# Altium PCB pcb.PcbDoc
Units mil, origin at the board's own origin, x right, y up, seen from the top; angles counter-clockwise.
Board outline 3859 x 2592 mil, 2 copper layers (Top Layer, Bottom Layer); 73 components, 56 nets, 373 pads, 1 vias.
Unrouted connection lines stored in the file: 224.
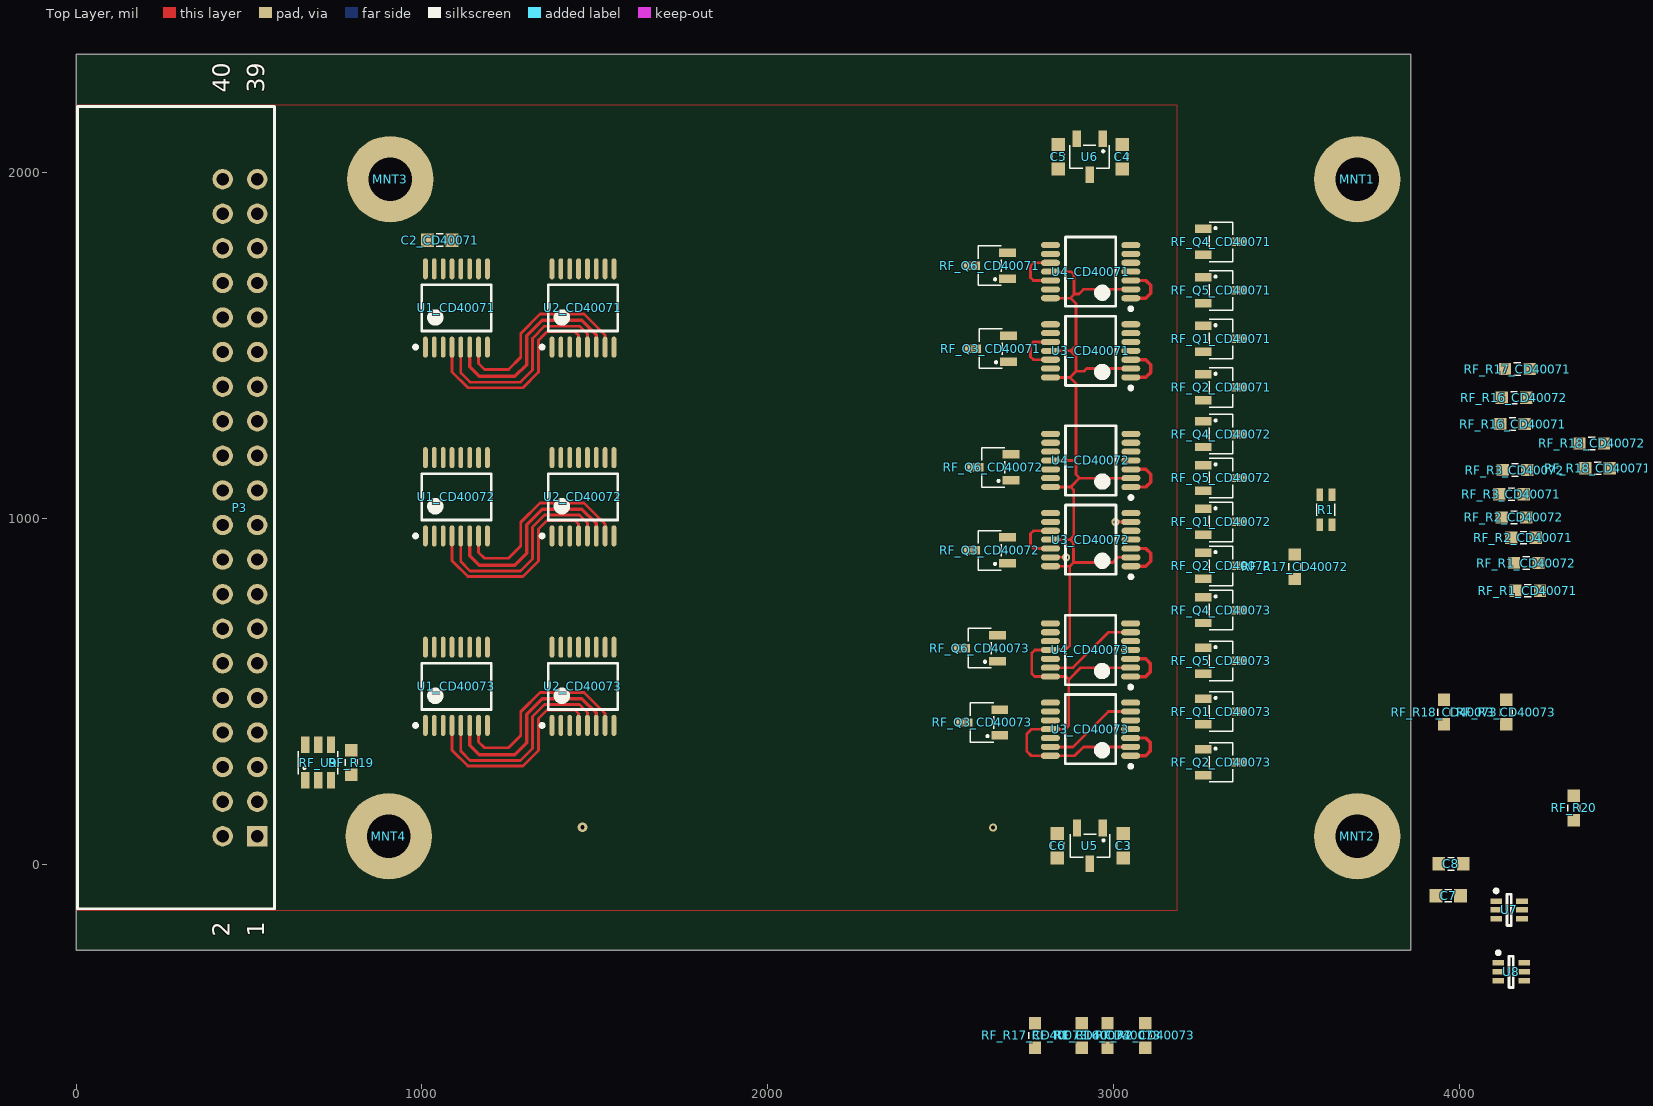
[diagram p0: Top Layer view]
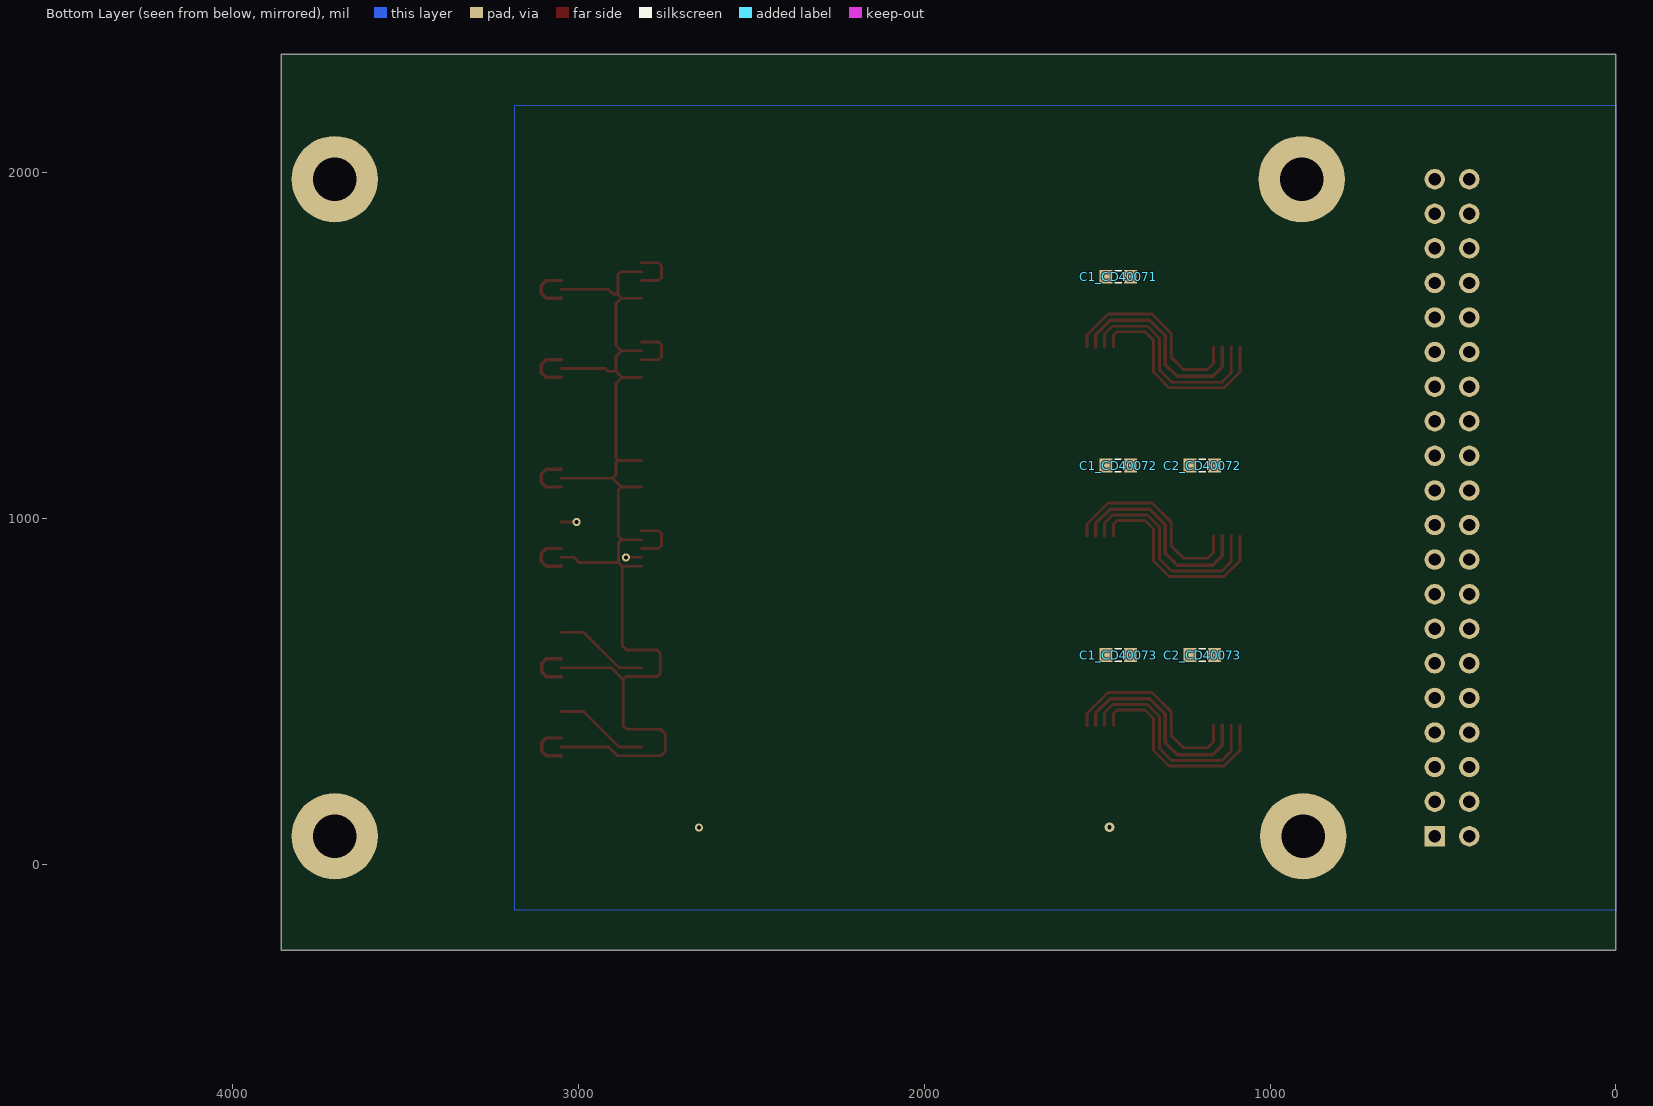
[diagram p1: Bottom Layer view, seen from below]

## Layer stack, top to bottom
Top Solder: solder mask 0.4, Solder Resist, Dk 3.5
Top Layer: signal copper 1.4
Dielectric 1: dielectric 12.6, FR-4, Dk 4.8
Bottom Layer: signal copper 1.4
Bottom Solder: solder mask 0.4, Solder Resist, Dk 3.5

## Board outline
0,-249 3859,-249 3859,2343 0,2343

## Design rules (kind name [scope] priority, off if disabled: settings)
Clearance Clearance_Polygon [InPolygon] p1: gap=12 ignorepadtopadclearanceinfootprint=FALSE except(0: Arc-Hole Track-Hole SMDPad-Hole THPad-Hole Via-Hole Fill-Hole Poly-Hole Region-Hole Text-Hole)
Clearance [All] p2: gap=6 ignorepadtopadclearanceinfootprint=TRUE
PolygonConnect PolygonConnect_Vias [IsVia] p1: connectstyle=Direct reliefconductorwidth=10 reliefentries=4 polygonreliefangle="90 Angle" airgapwidth=10
PolygonConnect [All] p2: connectstyle=Relief reliefconductorwidth=10 reliefentries=4 polygonreliefangle="90 Angle" airgapwidth=10
RoomDefinition CD40073 [InComponentClass('CD40073')] p1: confinementstyle=ConfineIn formatcopy=TRUE lockcomponents=FALSE outline 650,243.97 2640.76,243.97 2640.76,789.97 650,789.97
RoomDefinition CD40072 [InComponentClass('CD40072')] p2: confinementstyle=ConfineIn formatcopy=TRUE lockcomponents=FALSE outline 645,789.97 2640.76,789.97 2640.76,1335.97 645,1335.97
RoomDefinition CD40071 [InComponentClass('CD40071')] p3: confinementstyle=ConfineIn formatcopy=TRUE lockcomponents=FALSE outline 650,1335.97 2640.44,1335.97 2640.44,1881.97 650,1881.97
RoutingVias [All] p1: holewidth=11.81 width=23.81 viastyle="Through Hole" minholewidth=11.81 minwidth=23.81 maxholewidth=248.03 maxwidth=300.03
ShortCircuit ShortCircuit_general [All] p1: allowed=FALSE
SolderMaskExpansion [All] p1: expansion=4
Width [All] p1: maxlimit=100 minlimit=6 preferedwidth=8
29 further rules are at their usual default settings.

## Classes and differential pairs
channel class CD4007_with_mux: CD40071 CD40072 CD40073
component class top: C3 C4 C5 C6 C7 C8 MNT1 MNT2 MNT3 MNT4 P3 R1 RF_R19 RF_R20 RF_U9 U5 U6 U7 U8
component class CD40073: C1_CD40073 C2_CD40073 RF_Q1_CD40073 RF_Q2_CD40073 RF_Q3_CD40073 RF_Q4_CD40073 RF_Q5_CD40073 RF_Q6_CD40073 RF_R1_CD40073 RF_R2_CD40073 RF_R3_CD40073 RF_R16_CD40073 RF_R17_CD40073 RF_R18_CD40073 U1_CD40073 U2_CD40073 U3_CD40073 U4_CD40073
component class CD40072: C1_CD40072 C2_CD40072 RF_Q1_CD40072 RF_Q2_CD40072 RF_Q3_CD40072 RF_Q4_CD40072 RF_Q5_CD40072 RF_Q6_CD40072 RF_R1_CD40072 RF_R2_CD40072 RF_R3_CD40072 RF_R16_CD40072 RF_R17_CD40072 RF_R18_CD40072 U1_CD40072 U2_CD40072 U3_CD40072 U4_CD40072
component class CD40071: C1_CD40071 C2_CD40071 RF_Q1_CD40071 RF_Q2_CD40071 RF_Q3_CD40071 RF_Q4_CD40071 RF_Q5_CD40071 RF_Q6_CD40071 RF_R1_CD40071 RF_R2_CD40071 RF_R3_CD40071 RF_R16_CD40071 RF_R17_CD40071 RF_R18_CD40071 U1_CD40071 U2_CD40071 U3_CD40071 U4_CD40071

## Components (designator, comment, footprint, x,y, rotation, side; value= is the part's Value field where it differs from the comment)
C1_CD40071 "100n/50V" SMD_Capacitor_0603 1439.44,1698.97 r180 bottom (schematic designator C1)
C1_CD40072 "100n/50V" SMD_Capacitor_0603 1439.76,1152.97 r180 bottom (schematic designator C1)
C1_CD40073 "100n/50V" SMD_Capacitor_0603 1439,604.97 r180 bottom (schematic designator C1)
C2_CD40071 "100n/50V" SMD_Capacitor_0603 1052,1805 r180 top (schematic designator C2)
C2_CD40072 "100n/50V" SMD_Capacitor_0603 1196.76,1152.97 r180 bottom (schematic designator C2)
C2_CD40073 "100n/50V" SMD_Capacitor_0603 1196,604.97 r180 bottom (schematic designator C2)
C3 "100n/50V" SMD_Capacitor_0603 3028,53.41 r270 top
C4 "100n/50V" SMD_Capacitor_0603 3025,2045.97 r270 top
C5 "100n/50V" SMD_Capacitor_0603 2840,2045.97 r270 top
C6 "100n/50V" SMD_Capacitor_0603 2838,53.41 r270 top
C7 "100n/50V" SMD_Capacitor_0603 3968,-91.03 r0 top
C8 "100n/50V" SMD_Capacitor_0603 3976,1 r0 top
MNT1 "Mounting Hole" PC-104_PcbMntHole_M3 3705,1981 r180 top
MNT2 "Mounting Hole" PC-104_PcbMntHole_M3 3705,81 r0 top
MNT3 "Mounting Hole" PC-104_PcbMntHole_M3 909,1981 r0 top
MNT4 "Mounting Hole" PC-104_PcbMntHole_M3 904,81 r0 top
P3 "IDC-40-RadFET" IDC-40-Male-Socket-Angle 524,81 r90 top
R1 "PT1000" SMD_Resistor-shunt_0805 3614,1025 r90 top
RF_Q1_CD40071 "MMBFJ270" SOT23-3 3311,1519.33 r0 top (schematic designator RF_Q1)
RF_Q1_CD40072 "MMBFJ270" SOT23-3 3311,990 r0 top (schematic designator RF_Q1)
RF_Q1_CD40073 "MMBFJ270" SOT23-3 3311,441.67 r0 top (schematic designator RF_Q1)
RF_Q2_CD40071 "MMBFJ270" SOT23-3 3311,1379 r0 top (schematic designator RF_Q2)
RF_Q2_CD40072 "MMBFJ270" SOT23-3 3311,863 r0 top (schematic designator RF_Q2)
RF_Q2_CD40073 "MMBFJ270" SOT23-3 3311,295 r0 top (schematic designator RF_Q2)
RF_Q3_CD40071 "MMBFJ270" SOT23-3 2645,1491 r180 top (schematic designator RF_Q3)
RF_Q3_CD40072 "MMBFJ270" SOT23-3 2642,908 r180 top (schematic designator RF_Q3)
RF_Q3_CD40073 "MMBFJ270" SOT23-3 2620,410 r180 top (schematic designator RF_Q3)
RF_Q4_CD40071 "MMBFJ270" SOT23-3 3311,1800 r0 top (schematic designator RF_Q4)
RF_Q4_CD40072 "MMBFJ270" SOT23-3 3311,1244 r0 top (schematic designator RF_Q4)
RF_Q4_CD40073 "MMBFJ270" SOT23-3 3311,735 r0 top (schematic designator RF_Q4)
RF_Q5_CD40071 "MMBFJ270" SOT23-3 3311,1659.67 r0 top (schematic designator RF_Q5)
RF_Q5_CD40072 "MMBFJ270" SOT23-3 3311,1117 r0 top (schematic designator RF_Q5)
RF_Q5_CD40073 "MMBFJ270" SOT23-3 3311,588.33 r0 top (schematic designator RF_Q5)
RF_Q6_CD40071 "MMBFJ270" SOT23-3 2642,1731 r180 top (schematic designator RF_Q6)
RF_Q6_CD40072 "MMBFJ270" SOT23-3 2652,1148 r180 top (schematic designator RF_Q6)
RF_Q6_CD40073 "MMBFJ270" SOT23-3 2613,625 r180 top (schematic designator RF_Q6)
RF_R1_CD40071 "100k" SMD_Resistor_0603 4198,791 r0 top (schematic designator RF_R1)
RF_R1_CD40072 "100k" SMD_Resistor_0603 4193.43,871 r0 top (schematic designator RF_R1)
RF_R1_CD40073 "100k" SMD_Resistor_0603 2908,-495.03 r90 top (schematic designator RF_R1)
RF_R2_CD40071 "100k" SMD_Resistor_0603 4185.57,944 r0 top (schematic designator RF_R2)
RF_R2_CD40072 "100k" SMD_Resistor_0603 4158,1003 r0 top (schematic designator RF_R2)
RF_R2_CD40073 "100k" SMD_Resistor_0603 3092,-495.03 r90 top (schematic designator RF_R2)
RF_R3_CD40071 "100k" SMD_Resistor_0603 4151,1070 r0 top (schematic designator RF_R3)
RF_R3_CD40072 "100k" SMD_Resistor_0603 4161,1140 r0 top (schematic designator RF_R3)
RF_R3_CD40073 "100k" SMD_Resistor_0603 4136,439.97 r90 top (schematic designator RF_R3)
RF_R16_CD40071 "100k" SMD_Resistor_0603 4154,1273 r0 top (schematic designator RF_R16)
RF_R16_CD40072 "100k" SMD_Resistor_0603 4158,1349 r0 top (schematic designator RF_R16)
RF_R16_CD40073 "100k" SMD_Resistor_0603 2983,-495.03 r90 top (schematic designator RF_R16)
RF_R17_CD40071 "100k" SMD_Resistor_0603 4168,1432 r0 top (schematic designator RF_R17)
RF_R17_CD40072 "100k" SMD_Resistor_0603 3524,860 r90 top (schematic designator RF_R17)
RF_R17_CD40073 "100k" SMD_Resistor_0603 2773,-495.03 r90 top (schematic designator RF_R17)
RF_R18_CD40071 "100k" SMD_Resistor_0603 4400,1145 r0 top (schematic designator RF_R18)
RF_R18_CD40072 "100k" SMD_Resistor_0603 4383,1217 r0 top (schematic designator RF_R18)
RF_R18_CD40073 "100k" SMD_Resistor_0603 3956,439.97 r90 top (schematic designator RF_R18)
RF_R19 "75k" SMD_Resistor_0603 796,294 r90 top
RF_R20 "100k" SMD_Resistor_0603 4331,162.97 r90 top
RF_U9 "TPS2551DBVx" SOT23-6 700,294 r90 top
U1_CD40071 "ADG708BRU" ADI-RU-16_N 1100,1608.65 r90 top (schematic designator U1)
U1_CD40072 "ADG708BRU" ADI-RU-16_N 1100,1062.65 r90 top (schematic designator U1)
U1_CD40073 "ADG708BRU" ADI-RU-16_N 1100,514.65 r90 top (schematic designator U1)
U2_CD40071 "ADG708BRU" ADI-RU-16_N 1466,1608.65 r90 top (schematic designator U2)
U2_CD40072 "ADG708BRU" ADI-RU-16_N 1466,1062.65 r90 top (schematic designator U2)
U2_CD40073 "ADG708BRU" ADI-RU-16_N 1466,514.65 r90 top (schematic designator U2)
U3_CD40071 "CD4007" TSSOP14 2934,1484.65 r180 top (schematic designator U3)
U3_CD40072 "CD4007" TSSOP14 2934.32,938.65 r180 top (schematic designator U3)
U3_CD40073 "CD4007" TSSOP14 2933.56,390.65 r180 top (schematic designator U3)
U4_CD40071 "CD4007" TSSOP14 2934,1713.65 r180 top (schematic designator U4)
U4_CD40072 "CD4007" TSSOP14 2934.32,1167.65 r180 top (schematic designator U4)
U4_CD40073 "CD4007" TSSOP14 2933.56,619.65 r180 top (schematic designator U4)
U5 "LM60" SOT23-3 2932,53.41 r270 top
U6 "LM60" SOT23-3 2931,2045.97 r270 top
U7 "ADG849YKSZ" SC70-LT6_N 4144,-132.03 r0 top
U8 "ADG849YKSZ" SC70-LT6_N 4150,-311 r0 top

## Footprints (in the part's own frame and the unit in brackets; to place one, negate y for a bottom-side part, rotate by r counter-clockwise, add the part's x,y. Pads: shape width x height; smd on the part's side, far side on the other; paste and mask are expansions set on the pad)
ADI-RU-16_N [mm] "SOP, 16-Leads, Body 5x4.4mm, Pitch 0.65mm, IPC Medium Density"
  oval 1.55x0.35 smd: 1(-2.875,2.275) 2(-2.875,1.625) 3(-2.875,0.975) 4(-2.875,0.325) 5(-2.875,-0.325) 6(-2.875,-0.975) 7(-2.875,-1.625) 8(-2.875,-2.275) 9(2.875,-2.275) 10(2.875,-1.625) 11(2.875,-0.975) 12(2.875,-0.325) 13(2.875,0.325) 14(2.875,0.975) 15(2.875,1.625) 16(2.875,2.275)
  silkscreen extent -3,-2.55 1.7,3.12, body extent -2.25,-2.55 2.25,2.55, height 1.2
IDC-40-Male-Socket-Angle [mm] "Connector; IDC 40, Male Socket Angle"
  rect 1.5x1.5 hole 0.9: 1(0,0)
  round 1.5 hole 0.9: 2(0,2.54) 3(2.54,0) 4(2.54,2.54) 5(5.08,0) 6(5.08,2.54) 7(7.62,0) 8(7.62,2.54) 9(10.16,0) 10(10.16,2.54) 11(12.7,0) 12(12.7,2.54) 13(15.24,0) 14(15.24,2.54) 15(17.78,0) 16(17.78,2.54) 17(20.32,0) 18(20.32,2.54) 19(22.86,0) 20(22.86,2.54) 21(25.4,0) 22(25.4,2.54) 23(27.94,0) 24(27.94,2.54) 25(30.48,0) 26(30.48,2.54) 27(33.02,0) 28(33.02,2.54) 29(35.56,0) 30(35.56,2.54) 31(38.1,0) 32(38.1,2.54) 33(40.64,0) 34(40.64,2.54) 35(43.18,0) 36(43.18,2.54) 37(45.72,0) 38(45.72,2.54) 39(48.26,0) 40(48.26,2.54)
  silkscreen extent -5.33,-1.27 53.59,13.21, body extent -5.39,-0.25 53.65,13.31, height 9.08
PC-104_PcbMntHole_M3 [mm] "PCB Mounting Hole for PC-104 standard. Based on Pumpkin's Kit."
  round 6.35 hole 3.2: 1(0,0)
SC70-LT6_N [mm] "SOT353, 6-Leads, Body 2x1.3mm, Pitch 0.65mm, Lead Span 2.1mm, IPC Medium Density"
  rect 0.85x0.4 smd: 1(-0.95,0.65) 2(-0.95,0) 3(-0.95,-0.65) 4(0.95,-0.65) 5(0.95,0) 6(0.95,0.65)
  silkscreen extent -1.07,-1.15 0.15,1.52, body extent -1.05,-1 1.05,1, height 0.93
SMD_Capacitor_0603 [mm] "SMD Capacitor, Inch 0603, Metric 1608."
  rect 0.95x1 smd: 1(-0.9,0) 2(0.9,0)
  silkscreen extent -0.25,-0.45 0.25,0.45, body extent -0.8,-0.4 0.8,0.4, height 0.3
SMD_Resistor-shunt_0805 [mm] "SMD Shunt Resistor, Inch 0805, Metric 2012."
  rect 0.9x0.5 smd: 1(-1.1,0.45) 2(-1.1,-0.45) 3(1.1,-0.45) 4(1.1,0.45)
  silkscreen extent -0.45,-0.65 0.45,0.65, body extent -1,-0.62 1,0.63, height 0.5
SMD_Resistor_0603 [mm] "SMD Resistor, Inch 0603, Metric 1608."
  rect 0.9x0.9 smd: 1(-0.9,0) 2(0.9,0)
  silkscreen extent -0.25,-0.45 0.25,0.45, body extent -0.8,-0.45 0.8,0.45, height 0.5
SOT23-3 [mm] "JEDEC TO-236AB package."
  rect 1.22x0.62 smd: 1(-1.31,0.95) 2(-1.31,-0.95) 3(1.31,0)
  silkscreen extent -0.85,-1.45 0.85,1.45, body extent -1.4,-1.45 1.4,1.45, height 1.3
SOT23-6 [mm] "JEDEC MO-178AB package."
  rect 1.22x0.62 smd: 1(-1.31,0.95) 2(-1.31,0) 3(-1.31,-0.95) 4(1.31,-0.95) 5(1.31,0) 6(1.31,0.95)
  silkscreen extent -0.85,-1.45 0.85,1.45, body extent -1.4,-1.45 1.4,1.45, height 1.45
TSSOP14 [mm] "TSSOP, 14-Leads, Body 5.00x4.40mm, Pitch 0.65mm, IPC Medium Density"
  oval 1.4x0.45 smd: 1(-2.95,1.95) 2(-2.95,1.3) 3(-2.95,0.65) 4(-2.95,0) 5(-2.95,-0.65) 6(-2.95,-1.3) 7(-2.95,-1.95) 8(2.95,-1.95) 9(2.95,-1.3) 10(2.95,-0.65) 11(2.95,0) 12(2.95,0.65) 13(2.95,1.3) 14(2.95,1.95)
  silkscreen extent -3.08,-2.55 1.85,2.85, body extent -3.2,-2.55 3.2,2.55, height 1.2

## Part data
C1_CD40071 C1_CD40072 C1_CD40073 C2_CD40071 C2_CD40072 C2_CD40073 C3 C4 C5 C6 C7 C8: library part Cer_C0603T104K5RALTU, "Ceramic Cap Kemet COTS 100n/50V X7R 0603", Manufacturer=Kemet, ManufacturerPartNumber=C0603T104K5RALTU, Package=0603
MNT1 MNT2 MNT3 MNT4: library part MntHole, "PCB Mounting Hole"
R1: "Platinum Thin-Film Chip Sensor", Manufacturer="IST INNOVATIVE SENSOR TECHNOLOGY", ManufacturerPartNumber=P1K0.0805.2P.A, Package=0805_Shunt, Farnell=http://pl.farnell.com/ist-innovative-sensor-technology/p1k0-0805-2p-a/sensor-pt1000-smd0805-class-a/dp/1266951, Manufacturer's Datasheet=http://www.farnell.com/datasheets/57422.pdf, TCR=3850ppm/K
RF_Q1_CD40071 RF_Q1_CD40072 RF_Q1_CD40073 RF_Q2_CD40071 RF_Q2_CD40072 RF_Q2_CD40073 RF_Q3_CD40071 RF_Q3_CD40072 RF_Q3_CD40073 RF_Q4_CD40071 RF_Q4_CD40072 RF_Q4_CD40073 RF_Q5_CD40071 RF_Q5_CD40072 RF_Q5_CD40073 RF_Q6_CD40071 RF_Q6_CD40072 RF_Q6_CD40073: "JFET, P-Channel, 3-Pin SOT-23, Pb-Free, Tape and Reel", Manufacturer="On Semiconductor", ComponentLink1Description="Manufacturer URL", ComponentLink1URL=http://www.onsemi.com/, ComponentLink2Description=Datasheet, ComponentLink2URL=http://www.onsemi.com/pub_link/Collateral/MMBFJ177LT1-D.PDF, ComponentLink3Description="Package Specification", Mounting Technology="Surface Mount", PackageDescription="3-Pin Small Outline Transistor, Body 2.92 x 1.3 mm, Pitch 0.95 mm", PartNumber=MMBFJ270, RoHS=Pb-Free
RF_R1_CD40071 RF_R1_CD40072 RF_R1_CD40073 RF_R2_CD40071 RF_R2_CD40072 RF_R2_CD40073 RF_R3_CD40071 RF_R3_CD40072 RF_R3_CD40073 RF_R16_CD40071 RF_R16_CD40072 RF_R16_CD40073 RF_R17_CD40071 RF_R17_CD40072 RF_R17_CD40073 RF_R18_CD40071 RF_R18_CD40072 RF_R18_CD40073 RF_R19 RF_R20: library part Res, Package=0603
RF_U9: "Adjustable Current-Limited Power-Distribution Switch.", Manufacturer="Texas Instruments"
U1_CD40071 U1_CD40072 U1_CD40073 U2_CD40071 U2_CD40072 U2_CD40073: "1.8 to 5.5 V / +/-2.5 V, CMOS Low Voltage 3 Ohm, 8-Channel Multiplexer, -40 to 125 degC, 16-pin SOP (RU-16), Tube", Manufacturer="Analog Devices", Supplier Part Number 1=ADG708BRU-ND, Bandwidth (Hz)=55M, Code_JEDEC=MO-153AB, ComponentLink1Description="Manufacturer URL", ComponentLink1URL=http://www.analog.com/en/index.html, ComponentLink2Description=Datasheet, ComponentLink2URL=http://www.analog.com/static/imported-files/data_sheets/ADG708_709.pdf, ComponentLink3Description="Package Specification", ComponentLink3URL=http:/www.analog.com/static/imported-files/packages/36244347913743854010197452789RU16.pdf, DatasheetVersion="Rev. C", Max Analog Signal Range="Vss to Vdd", Mounting Technology="Surface Mount", PackageDescription="16-Pin Thin Shrink Small Outline Package, Body 5 x 4.4 mm, Pitch 0.65 mm", PackageReference=RU-16, PackageVersion=Nov-02, Packing=Tube, PartNumber=ADG708BRU, Ron (ohms)=3, Supplier 1=Digi-Key, Supplier 2=Mouser, Supplier Part Number 2=584-ADG708BRU, Supply V Guar Performance="Dual_(+/-2.5V), Single_(+3V), Single_(+5V)", t transition (s)=14n
U3_CD40071 U3_CD40072 U3_CD40073 U4_CD40071 U4_CD40072 U4_CD40073: "CMOS Dual Complementary Pair Plus Inverter", ComponentLink1Description=Datasheet, ComponentLink1URL=http://www.mouser.com/catalog/specsheets/AT45DB041D.pdf
U5 U6: "Analog temperature sensor"
U7 U8: "CMOS Analog switch", Manufacturer="Analog Devices", ManufacturerPartNumber=ADG849YKSZ
P3: LatestRevisionDate=17-Jul-2002, LatestRevisionNote="Re-released for DXP Platform.", Publisher="Altium Limited"

## Free pads (board coordinates)
  round 23.62 hole 11.81: 0(2652,106) 0(2863,887.47) 0(3005.63,989.83)

## Via types
v1: diameter 28.35, hole 11.81, Top Layer to Bottom Layer, tented both sides, 1 vias

## Nets (pads, with @x,y where several pads share a name; then routed paths per layer and width w, separated by ;. In a path a pad name is that pad's centre, name@x,y a point inside that pad or via, vN(x,y) a via of type N, cw(c..) or ccw(c..) an arc to the next point about the centre after c; other vN are vias at no path point)
3.3V-DIGITAL: P3.4
4.5V-ANALOG: P3.1 RF_U9.1
4v5_LCL: C1_CD40071.1 C1_CD40072.1 C1_CD40073.1 C2_CD40071.1 C2_CD40072.1 C2_CD40073.1 C7.1 C8.1 RF_Q1_CD40071.3 RF_Q1_CD40072.3 RF_Q1_CD40073.3 RF_Q2_CD40071.3 RF_Q2_CD40072.3 RF_Q2_CD40073.3 RF_Q3_CD40071.3 RF_Q3_CD40072.3 RF_Q3_CD40073.3 RF_Q4_CD40071.3 RF_Q4_CD40072.3 RF_Q4_CD40073.3 RF_Q5_CD40071.3 RF_Q5_CD40072.3 RF_Q5_CD40073.3 RF_Q6_CD40071.3 RF_Q6_CD40072.3 RF_Q6_CD40073.3 RF_R1_CD40071.2 RF_R1_CD40072.2 RF_R1_CD40073.2 RF_R2_CD40071.2 RF_R2_CD40072.2 RF_R2_CD40073.2 RF_R3_CD40071.2 RF_R3_CD40072.2 RF_R3_CD40073.2 RF_R16_CD40071.2 RF_R16_CD40072.2 RF_R16_CD40073.2 RF_R17_CD40071.2 RF_R17_CD40072.2 RF_R17_CD40073.2 RF_R18_CD40071.2 RF_R18_CD40072.2 RF_R18_CD40073.2 RF_R20.2 RF_U9.6 U1_CD40071.13 U1_CD40072.13 U1_CD40073.13 U2_CD40071.13 U2_CD40072.13 U2_CD40073.13 U7.2 U8.2
5V-ANALOG: C3.1 C4.1 P3.2 U5.1 U6.1
ADC_CD40071_P: P3.6 P3.9 P3.12 RF_Q1_CD40071.1 RF_Q1_CD40072.1 RF_Q1_CD40073.1 RF_Q2_CD40071.1 RF_Q2_CD40072.1 RF_Q2_CD40073.1 RF_Q3_CD40071.1 RF_Q3_CD40072.1 RF_Q3_CD40073.1 RF_Q4_CD40071.1 RF_Q4_CD40072.1 RF_Q4_CD40073.1 RF_Q5_CD40071.1 RF_Q5_CD40072.1 RF_Q5_CD40073.1 RF_Q6_CD40071.1 RF_Q6_CD40072.1 RF_Q6_CD40073.1 U3_CD40071.2 U3_CD40071.11 U3_CD40071.14 U3_CD40072.2 U3_CD40072.11 U3_CD40072.14 U3_CD40073.2 U3_CD40073.11 U3_CD40073.14 U4_CD40071.2 U4_CD40071.11 U4_CD40071.14 U4_CD40072.2 U4_CD40072.11 U4_CD40072.14 U4_CD40073.2 U4_CD40073.11 U4_CD40073.14 U8.5 | length 3395.8
  Top Layer w8: U3_CD40071.14 2874.12,1407.88 ; U3_CD40071.11 2876.35,1484.65 ; U4_CD40071.14 2875.12,1636.88 ; U4_CD40071.11 2877.35,1713.65 2886,1705 2886,1649 2900,1649 2913.47,1662.47 U4_CD40071.2 ; U3_CD40072.14 2873.88,861.88 ; U3_CD40072.11 2874.5,938.65 ; U4_CD40072.14 2876.9,1090.88 ; U4_CD40072.11 2885.35,1167.65 ; 2886,1647.76 2875.62,1637.38 2892,1621 2892,1500.31 2876.35,1484.65 ; 2902.49,1116.47 U4_CD40072.2 ; U3_CD40073.2 2913.47,339.47 2887.88,313.88 U3_CD40073.14 2762.12,313.88 2749,327 2749,376 2763.65,390.65 U3_CD40073.11 2860.65,390.65 2871,401 2871,534 ; U4_CD40073.2 2905.47,568.47 2871,534 ; U3_CD40071.2 2922.47,1433.47 2914.76,1425.76 2892,1425.76 ; U3_CD40072.2 3012.47,887.47 2997.81,872.81 2884.81,872.81 ; 2871,534 2862.12,542.88 U4_CD40073.14 2772.12,542.88 2764,551 2764,611 2772.65,619.65 U4_CD40073.11 2860.65,619.65 2873.88,632.88 2873.88,861.88 ; 2873.88,861.88 2884.81,872.81 ; 2874.12,1407.88 2892,1425.76 ; 2874.12,1407.88 2892,1390 2892,1174.31 2885.35,1167.65 ; 2876.35,1484.65 2892,1469 2892,1425.76 ; 2876.9,1090.88 2885,1082.78 2885,949.15 2874.92,939.08 2884.81,929.19 2884.81,872.81 ; 2876.9,1090.88 2876.39,1091.39 2901.98,1116.98 2892,1126.96 2892,1161 2885.35,1167.65
ADC_CH0_N: P3.7 U2_CD40073.8
ADC_CH1_N: P3.10 U2_CD40072.8
ADC_CH2_N: P3.13 U2_CD40071.8
AIN0: C5.1 P3.29 U6.2
AIN1: C6.1 P3.30 U5.2
"CURRENT IN_RAW": P3.32 U7.4 U8.4
"CURRENT RTN": C1_CD40071.2 C1_CD40072.2 C1_CD40073.2 C2_CD40071.2 C2_CD40072.2 C2_CD40073.2 C3.2 C4.2 C5.2 C6.2 C7.2 C8.2 P3.3 P3.8 P3.11 P3.14 P3.28 P3.31 P3.33 P3.34 P3.39 P3.40 RF_R19.1 RF_R20.1 RF_U9.2 U1_CD40071.3 U1_CD40071.8 U1_CD40071.14 U1_CD40072.3 U1_CD40072.8 U1_CD40072.14 U1_CD40073.3 U1_CD40073.8 U1_CD40073.14 U2_CD40071.3 U2_CD40071.14 U2_CD40072.3 U2_CD40072.14 U2_CD40073.3 U2_CD40073.14 U5.3 U6.3 U7.3 U8.3
DIODE_0-2_CD40071: U1_CD40071.4 U2_CD40071.4 U3_CD40071.8 | length 616.4
  Top Layer w8: U1_CD40071.4 1087.2,1423.8 1133,1378 1292,1378 1337,1423 1337,1515.29 1361.71,1540 1443,1540 1453.2,1529.8 U2_CD40071.4
DIODE_0-2_CD40072: U1_CD40072.4 U2_CD40072.4 U3_CD40072.8 | length 616.4
  Top Layer w8: U1_CD40072.4 1087.2,877.8 1133,832 1292,832 1337,877 1337,969.29 1361.71,994 1443,994 1453.2,983.8 U2_CD40072.4
DIODE_0-2_CD40073: U1_CD40073.4 U2_CD40073.4 U3_CD40073.8 | length 616.4
  Top Layer w8: U1_CD40073.4 1087.2,329.8 1133,284 1292,284 1337,329 1337,421.29 1361.71,446 1443,446 1453.2,435.8 U2_CD40073.4
DIODE_3-5_CD40071: U1_CD40071.9 U2_CD40071.9 U4_CD40071.8
DIODE_3-5_CD40072: U1_CD40072.9 U2_CD40072.9 U4_CD40072.8
DIODE_3-5_CD40073: U1_CD40073.9 U2_CD40073.9 U4_CD40073.8
DIODE_BIAS: U3_CD40071.7 U3_CD40072.7 U3_CD40073.7 U4_CD40071.7 U4_CD40072.7 U4_CD40073.7 U7.5
FORCE+: P3.35 R1.4
FORCE-: P3.37 R1.1
GATE_0_CD40071: RF_Q1_CD40071.2 RF_R16_CD40071.1 U1_CD40071.7 U2_CD40071.7 U3_CD40071.6 U3_CD40071.13 | length 587
  Top Layer w8: U1_CD40071.7 1163.98,1448.02 1180.98,1431.02 1251.02,1431.02 1286,1466 1286,1535 1342,1591 1469,1591 1529.98,1530.02 U2_CD40071.7
GATE_0_CD40072: pad.0@2863,887.47 pad.0@3005.63,989.83 RF_Q1_CD40072.2 RF_R16_CD40072.1 U1_CD40072.7 U2_CD40072.7 U3_CD40072.6 U3_CD40072.13 | length 676.6
  Top Layer w8: U1_CD40072.7 1163.98,902.02 1180.98,885.02 1251.02,885.02 1286,920 1286,989 1342,1045 1469,1045 1529.98,984.02 U2_CD40072.7 ; U3_CD40072.13 pad.0@2863,887.47 ; pad.0@3005.63,989.83 U3_CD40072.6
GATE_0_CD40073: RF_Q1_CD40073.2 RF_R16_CD40073.1 U1_CD40073.7 U2_CD40073.7 U3_CD40073.6 U3_CD40073.13 | length 861.7
  Top Layer w8: U1_CD40073.7 1163.98,354.02 1180.98,337.02 1251.02,337.02 1286,372 1286,441 1342,497 1469,497 1529.98,436.02 U2_CD40073.7 ; U3_CD40073.13 2882.72,339.47 2985.08,441.83 U3_CD40073.6
GATE_1_CD40071: RF_Q2_CD40071.2 RF_R17_CD40071.1 U1_CD40071.6 U2_CD40071.6 U3_CD40071.1 U3_CD40071.3 | length 752.5
  Top Layer w10: U1_CD40071.6 1138.39,1438.61 1166,1411 1269,1411 1303,1445 1303,1527.96 1348.04,1573 1462.96,1573 1504.39,1531.57 U2_CD40071.6 ; U3_CD40071.1 3093.32,1407.88 3107.44,1422 3107.44,1444.94 3093.32,1459.06 U3_CD40071.3
GATE_1_CD40072: RF_Q2_CD40072.2 RF_R17_CD40072.1 U1_CD40072.6 U2_CD40072.6 U3_CD40072.1 U3_CD40072.3 | length 752.5
  Top Layer w10: U1_CD40072.6 1138.39,892.61 1166,865 1269,865 1303,899 1303,981.96 1348.04,1027 1462.96,1027 1504.39,985.57 U2_CD40072.6 ; U3_CD40072.1 3093.64,861.88 3107.76,876 3107.76,898.94 3093.64,913.06 U3_CD40072.3
GATE_1_CD40073: RF_Q2_CD40073.2 RF_R17_CD40073.1 U1_CD40073.6 U2_CD40073.6 U3_CD40073.1 U3_CD40073.3 | length 752.5
  Top Layer w10: U1_CD40073.6 1138.39,344.61 1166,317 1269,317 1303,351 1303,433.96 1348.04,479 1462.96,479 1504.39,437.57 U2_CD40073.6 ; U3_CD40073.1 3092.88,313.88 3107,328 3107,350.94 3092.88,365.06 U3_CD40073.3
GATE_2_CD40071: RF_Q3_CD40071.2 RF_R18_CD40071.1 U1_CD40071.5 U2_CD40071.5 U3_CD40071.10 U3_CD40071.12 | length 776.4
  Top Layer w8: U1_CD40071.5 1112.8,1420.83 1139.63,1394 1285,1394 1320,1429 1320,1520.92 1355.08,1556 1455.92,1556 1478.8,1533.12 U2_CD40071.5 ; 2760,1484.31 2760,1467.31 2768.24,1459.06 U3_CD40071.12 ; 2760,1485 2760,1502 2768.24,1510.24 U3_CD40071.10
GATE_2_CD40072: RF_Q3_CD40072.2 RF_R18_CD40072.1 U1_CD40072.5 U2_CD40072.5 U3_CD40072.10 U3_CD40072.12 | length 776.4
  Top Layer w8: U1_CD40072.5 1112.8,874.83 1139.63,848 1285,848 1320,883 1320,974.92 1355.08,1010 1455.92,1010 1478.8,987.12 U2_CD40072.5 ; 2760.32,938.31 2760.32,921.31 2768.56,913.06 U3_CD40072.12 ; 2760.32,939 2760.32,956 2768.56,964.24 U3_CD40072.10
GATE_2_CD40073: RF_Q3_CD40073.2 RF_R18_CD40073.1 U1_CD40073.5 U2_CD40073.5 U3_CD40073.10 U3_CD40073.12 | length 619.8
  Top Layer w8: U1_CD40073.5 1112.8,326.83 1139.63,300 1285,300 1320,335 1320,426.92 1355.08,462 1455.92,462 1478.8,439.12 U2_CD40073.5
GATE_3_CD40071: RF_Q4_CD40071.2 RF_R1_CD40071.1 U1_CD40071.11 U2_CD40071.11 U4_CD40071.6 U4_CD40071.13
GATE_3_CD40072: RF_Q4_CD40072.2 RF_R1_CD40072.1 U1_CD40072.11 U2_CD40072.11 U4_CD40072.6 U4_CD40072.13
GATE_3_CD40073: RF_Q4_CD40073.2 RF_R1_CD40073.1 U1_CD40073.11 U2_CD40073.11 U4_CD40073.6 U4_CD40073.13 | length 274.7
  Top Layer w8: U4_CD40073.13 2882.72,568.47 2985.08,670.83 U4_CD40073.6
GATE_4_CD40071: RF_Q5_CD40071.2 RF_R2_CD40071.1 U1_CD40071.12 U2_CD40071.12 U4_CD40071.1 U4_CD40071.3 | length 149.2
  Top Layer w10: U4_CD40071.1 3093.32,1636.88 3107.44,1651 3107.44,1673.94 3093.32,1688.06 U4_CD40071.3
GATE_4_CD40072: RF_Q5_CD40072.2 RF_R2_CD40072.1 U1_CD40072.12 U2_CD40072.12 U4_CD40072.1 U4_CD40072.3 | length 149.2
  Top Layer w10: U4_CD40072.1 3093.64,1090.88 3107.76,1105 3107.76,1127.94 3093.64,1142.06 U4_CD40072.3
GATE_4_CD40073: RF_Q5_CD40073.2 RF_R2_CD40073.1 U1_CD40073.12 U2_CD40073.12 U4_CD40073.1 U4_CD40073.3 | length 149.2
  Top Layer w10: U4_CD40073.1 3092.88,542.88 3107,557 3107,579.94 3092.88,594.06 U4_CD40073.3
GATE_5_CD40071: RF_Q6_CD40071.2 RF_R3_CD40071.1 U1_CD40071.10 U2_CD40071.10 U4_CD40071.10 U4_CD40071.12 | length 156.5
  Top Layer w8: 2760,1713.31 2760,1696.31 2768.24,1688.06 U4_CD40071.12 ; 2760,1714 2760,1731 2768.24,1739.24 U4_CD40071.10
GATE_5_CD40072: RF_Q6_CD40072.2 RF_R3_CD40072.1 U1_CD40072.10 U2_CD40072.10 U4_CD40072.10 U4_CD40072.12
GATE_5_CD40073: RF_Q6_CD40073.2 RF_R3_CD40073.1 U1_CD40073.10 U2_CD40073.10 U4_CD40073.10 U4_CD40073.12
GND: P3.5
GPIO0: P3.16 U1_CD40071.1 U1_CD40072.1 U1_CD40073.1 U2_CD40071.1 U2_CD40072.1 U2_CD40073.1
GPIO1: P3.15 U1_CD40071.15 U1_CD40072.15 U1_CD40073.15 U2_CD40071.15 U2_CD40072.15 U2_CD40073.15
GPIO2: P3.18 U1_CD40073.2 U2_CD40073.2
GPIO3: P3.17 U1_CD40071.16 U1_CD40072.16 U1_CD40073.16 U2_CD40071.16 U2_CD40072.16 U2_CD40073.16
GPIO4: P3.20 U1_CD40072.2 U2_CD40072.2
GPIO5: P3.19 U1_CD40071.2 U2_CD40071.2
GPIO6: P3.21 U8.1
GPIO7: P3.22 RF_U9.3
GPIO8: P3.23
GPIO9: P3.24
GPIO10: P3.25
GPIO11: P3.26
GPIO12: P3.27 U7.1
NetRF_R19_2: RF_R19.2 RF_U9.5
RTDIN+: P3.36 R1.3
RTDIN-: P3.38 R1.2
pads on no net: MNT1.1 MNT2.1 MNT3.1 MNT4.1 RF_U9.4 U3_CD40071.4 U3_CD40071.5 U3_CD40071.9 U3_CD40072.4 U3_CD40072.5 U3_CD40072.9 U3_CD40073.4 U3_CD40073.5 U3_CD40073.9 U4_CD40071.4 U4_CD40071.5 U4_CD40071.9 U4_CD40072.4 U4_CD40072.5 U4_CD40072.9 U4_CD40073.4 U4_CD40073.5 U4_CD40073.9 U7.6 U8.6
copper on no net:
  other v1: 1465,107

## Polygon pours and split planes (outlines as drawn)
"CURRENT RTN" on Bottom Layer "NONET_L02_P000" (solid, remove dead copper, shelved, pour order 0): 0,2194.97 0,-133.03 3184,-133.03 3184,2194.97
"CURRENT RTN" on Top Layer "NONET_L01_P002" (solid, remove dead copper, shelved, pour order 2): 0,2194.97 0,-133.03 3184,-133.03 3184,2194.97

## Silkscreen, mask and mechanical layers (free items; w line width, h text height)
Mechanical 1:
  lines w8: 4,-129 3859,-129 3859,2191 4,2191 4,-129

## Text inside footprints (layer, text, board x,y; h text height)
P3: Top Overlay "2" at 444,-209 h50 r90; Top Overlay "40" at 444,2231 h50 r90; Top Overlay "1" at 544,-209 h50 r90; Top Overlay "39" at 544,2231 h50 r90